# Altium PCB JLINK V8_V1.PcbDoc
Units mm, origin at the board's own origin, x right, y up, seen from the top; angles counter-clockwise.
Board outline 69.48 x 46.62 mm, 2 copper layers (Top Layer, Bottom Layer); 71 components, 76 nets, 356 pads, 84 vias.
Unrouted connection lines stored in the file: 5.
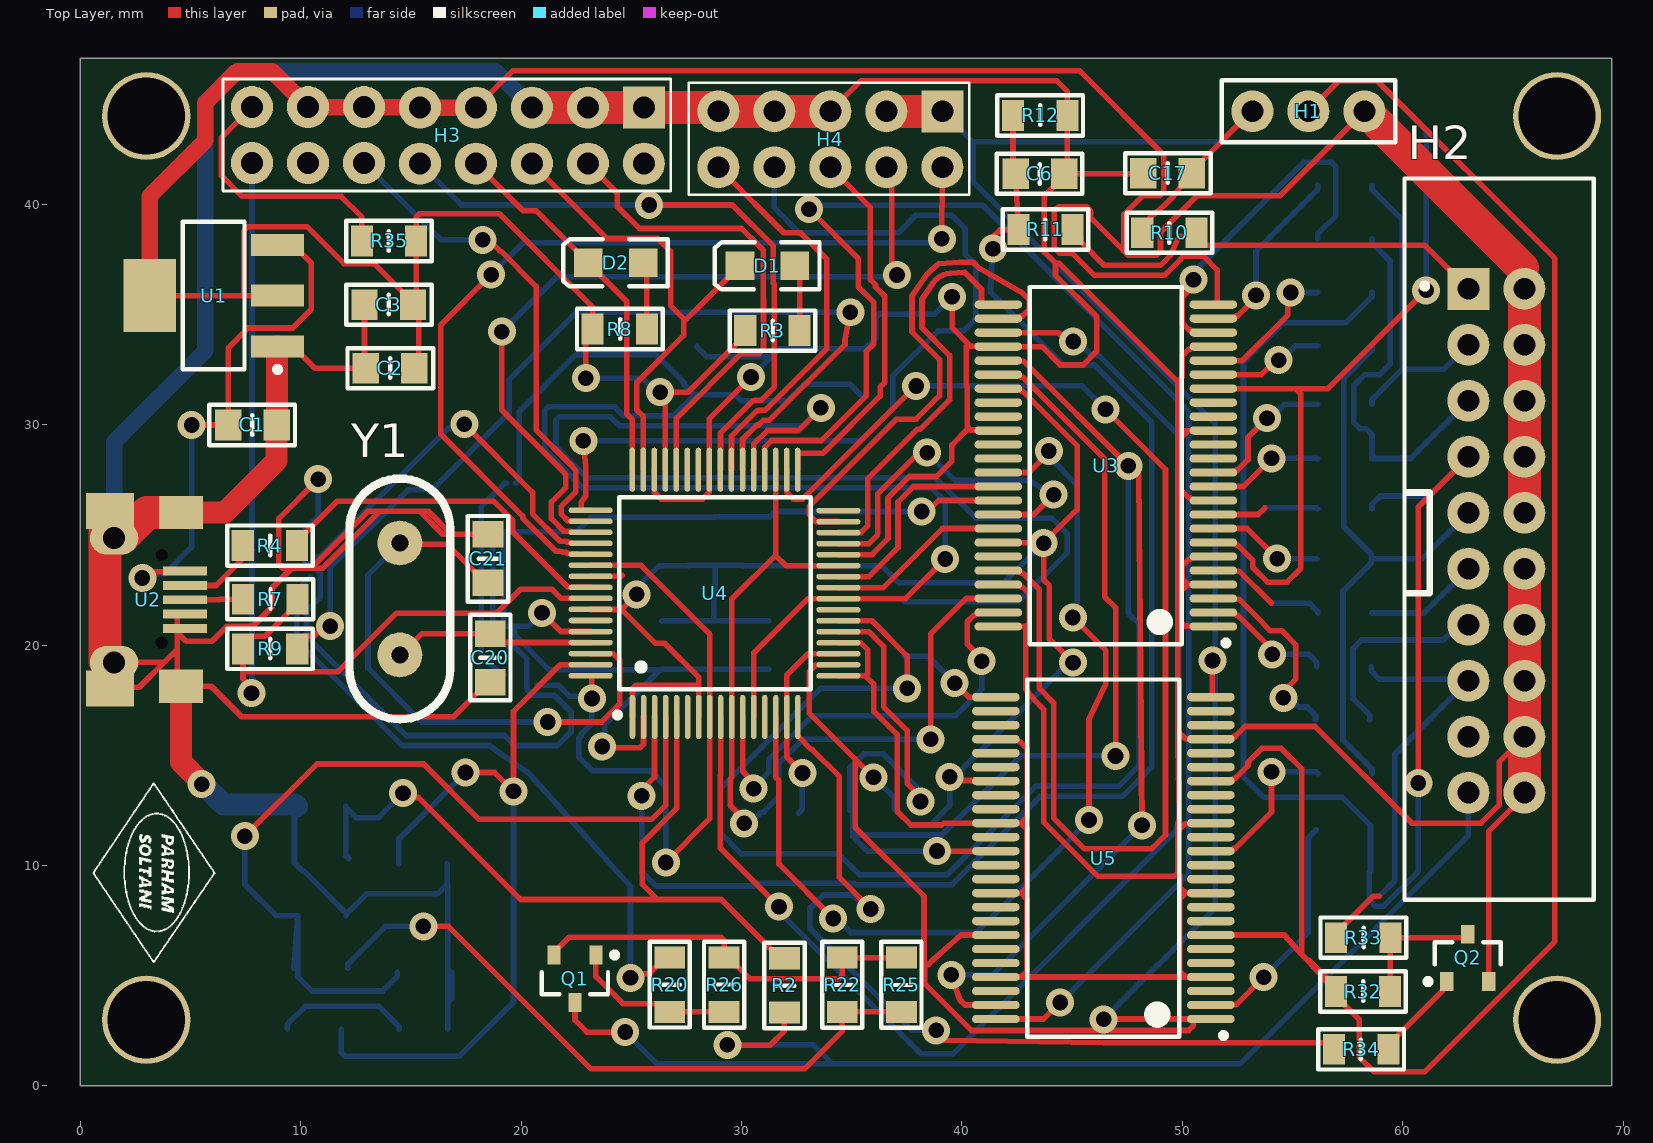
[diagram p0: Top Layer view]
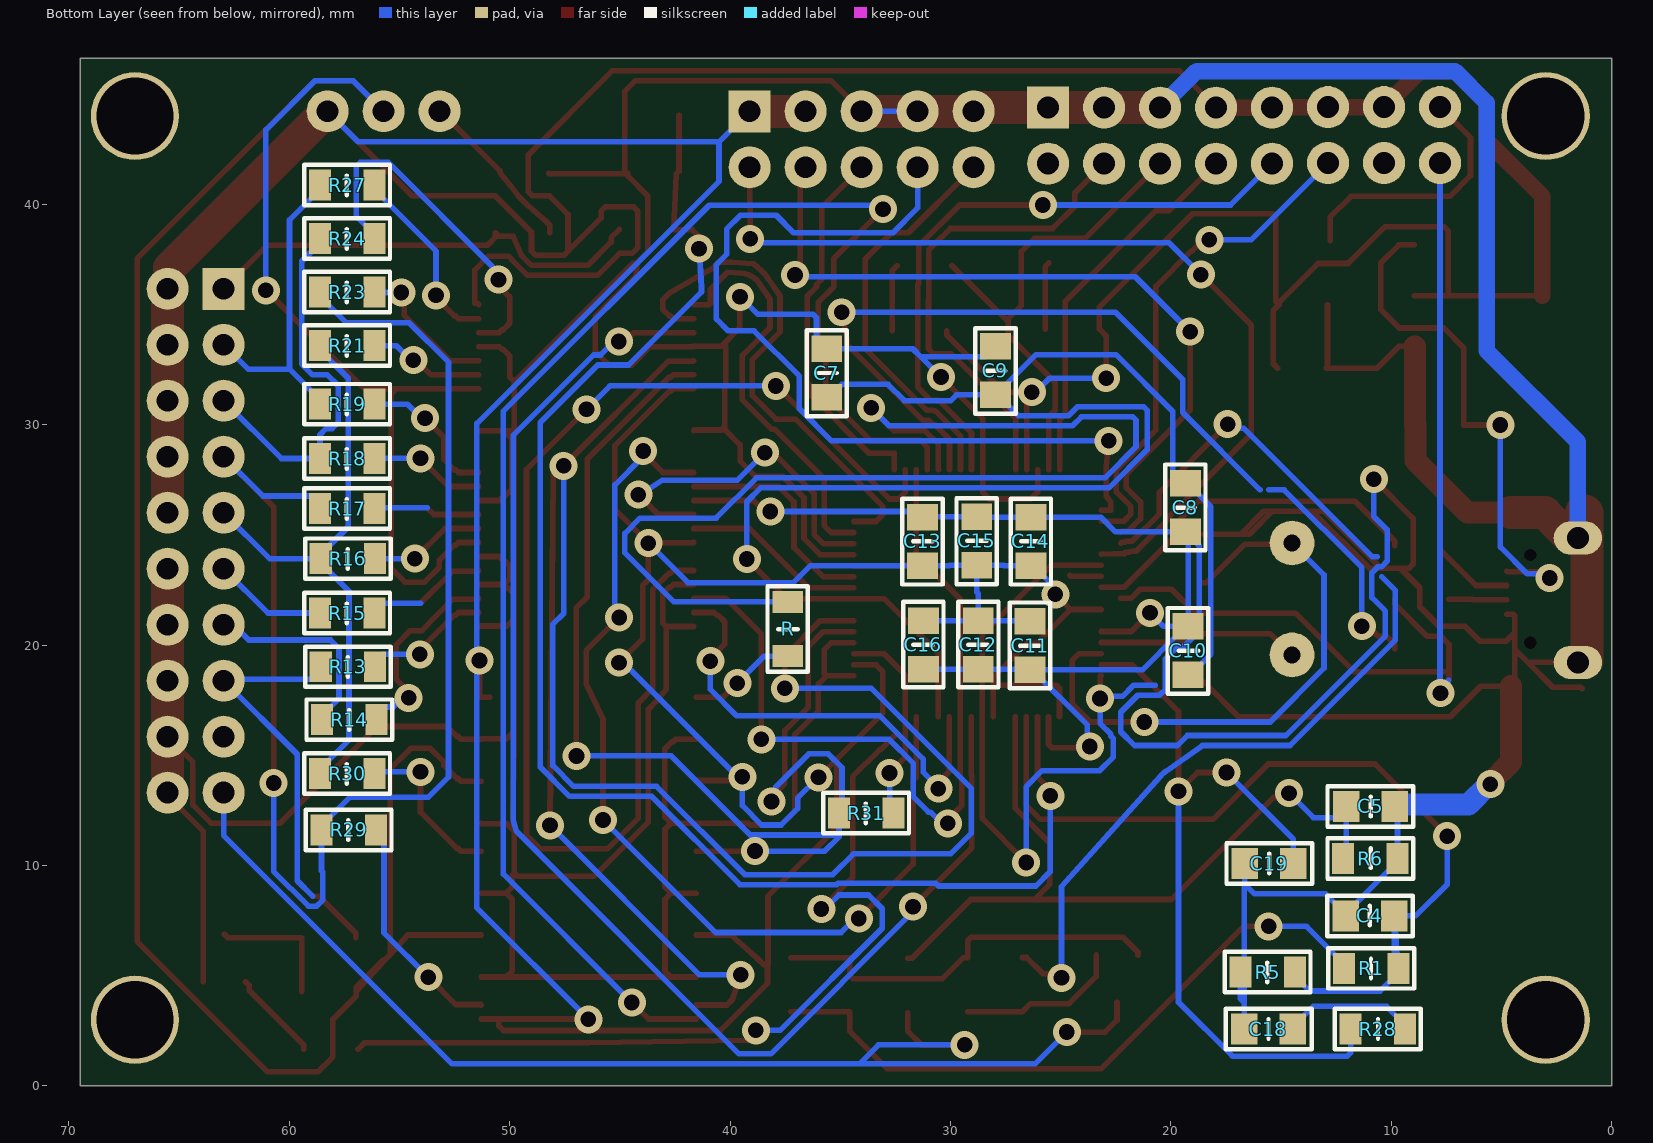
[diagram p1: Bottom Layer view, seen from below]

## Layer stack, top to bottom
Top Solder: solder mask 0.0102, Solder Resist, Dk 3.5
Top Layer: signal copper 0.0356
Dielectric 1: dielectric 0.32, FR-4, Dk 4.8
Bottom Layer: signal copper 0.0356
Bottom Solder: solder mask 0.0102, Solder Resist, Dk 3.5

## Board outline
0,0 69.485,0 69.485,46.624 0,46.624

## Design rules (kind name [scope] priority, off if disabled: settings)
Clearance POLYGON [InPolygon] p1: gap=0.635 ignorepadtopadclearanceinfootprint=FALSE except(0: Arc-Hole Track-Hole SMDPad-Hole THPad-Hole Via-Hole Fill-Hole Poly-Hole Region-Hole Text-Hole)
Clearance [All] p2: gap=0.305 ignorepadtopadclearanceinfootprint=TRUE except(0: Arc-Hole Track-Hole SMDPad-Hole THPad-Hole Via-Hole Fill-Hole Poly-Hole Region-Hole Text-Hole; 0.2: Arc-Arc Arc-Track Arc-SMDPad Track-Track Track-SMDPad SMDPad-SMDPad)
PlaneConnect [All] p1: planeconnectstyle=Direct reliefexpansion=0.508 reliefentries=4 reliefconductorwidth=0.254 reliefairgap=0.254
PolygonConnect [All] p1: connectstyle=Direct reliefconductorwidth=0.254 reliefentries=4 polygonreliefangle="90 Angle" airgapwidth=0.254
RoutingVias [All] p1: holewidth=0.711 width=1.27 viastyle="Through Hole" minholewidth=0.711 minwidth=1.27 maxholewidth=0.711 maxwidth=1.27
SolderMaskExpansion [All] p1: expansion=0.102 istentingtop=FALSE
Width [All] p1: maxlimit=5 minlimit=0.254 preferedwidth=0.254 minimp=50.000000 maximp=50.000000 favimp=50.000000
29 further rules are at their usual default settings.

## Components (designator, comment, footprint, x,y, rotation, side; value= is the part's Value field where it differs from the comment)
C1 "10uf" "CAP-0805 - better" 7.815,29.985 r0 top
C2 "10uf" "CAP-0805 - better" 14.06,32.557 r180 top
C3 "100uf" "CAP-0805 - better" 13.998,35.438 r180 top
C4 "100nf" "CAP-0805 - better" 10.98,7.711 r0 bottom
C5 "100nf" "CAP-0805 - better" 10.942,12.679 r180 bottom
C6 "100nf" "CAP-0805 - better" 43.539,41.38 r0 top
C7 "10uf" "CAP-0805 - better" 35.618,32.341 r90 bottom
C8 "100nf" "CAP-0805 - better" 19.347,26.236 r270 bottom
C9 "100nf" "CAP-0805 - better" 27.965,32.446 r90 bottom
C10 "100nf" "CAP-0805 - better" 19.224,19.75 r90 bottom
C11 "10uf" "CAP-0805 - better" 26.393,19.973 r270 bottom
C12 "100nf" "CAP-0805 - better" 28.74,20.01 r270 bottom
C13 "100nf" "CAP-0805 - better" 31.27,24.704 r90 bottom
C14 "100nf" "CAP-0805 - better" 26.356,24.704 r90 bottom
C15 "100nf" "CAP-0805 - better" 28.813,24.723 r90 bottom
C16 "100nf" "CAP-0805 - better" 31.234,20.01 r270 bottom
C17 "100nf" "CAP-0805 - better" 49.332,41.404 r180 top
C18 "10nf" "CAP-0805 - better" 15.577,2.578 r0 bottom
C19 "1nf" "CAP-0805 - better" 15.548,10.085 r0 bottom
C20 "22pf" "CAP-0805 - better" 18.606,19.418 r270 top
C21 "22pf" "CAP-0805 - better" 18.505,23.922 r90 top
D1 "LED" LED-SMD-0805 32.423,37.207 r180 top
D2 "LED" LED-SMD-0805 25.54,37.341 r180 top
H1 "Header 3" PIN-header3(copy) 58.261,44.216 r180 top
H2 "IDC-box-2*10" ICD-box_10*2 62.976,36.163 r270 top
H3 "IDC-box-2*8" "male-Header 2*8" 25.575,44.407 r180 top
H4 "IDC-box-2*5" "male-Header-2*5 - duplicate" 39.114,44.212 r180 top
Q1 "BC857a" sot23 22.447,4.863 r270 top
Q2 "BC847b" sot23 62.947,5.808 r90 top
R "0R" Res_SMD_0805 37.388,20.717 r270 bottom value=1K
R1 "10k" Res_SMD_0805 10.926,5.332 r0 bottom value=1K
R2 "10k" Res_SMD_0805 31.949,4.546 r270 top value=1K
R3 "330R" Res_SMD_0805 31.417,34.264 r0 top value=1K
R4 "47R" Res_SMD_0805 8.62,24.511 r0 top value=1K
R5 "10K" Res_SMD_0805 15.626,5.165 r0 bottom value=1K
R6 "10K" Res_SMD_0805 10.942,10.315 r180 bottom value=1K
R7 "47R" Res_SMD_0805 8.636,22.077 r0 top value=1K
R8 "330R" Res_SMD_0805 24.493,34.336 r0 top value=1K
R9 "1.5k" Res_SMD_0805 8.629,19.826 r0 top value=1K
R10 "4R7" Res_SMD_0805 49.401,38.703 r180 top value=1K
R11 "10K" Res_SMD_0805 43.779,38.855 r180 top value=1K
R12 "10K" Res_SMD_0805 43.564,44.024 r0 top value=1K
R13 "220R" Res_SMD_0805 57.352,19.016 r0 bottom value=1K
R14 "220R" Res_SMD_0805 57.287,16.614 r0 bottom value=1K
R15 "220R" Res_SMD_0805 57.385,21.452 r0 bottom value=1K
R16 "220R" Res_SMD_0805 57.352,23.92 r0 bottom value=1K
R17 "220R" Res_SMD_0805 57.385,26.19 r0 bottom value=1K
R18 "220R" Res_SMD_0805 57.385,28.461 r0 bottom value=1K
R19 "220R" Res_SMD_0805 57.385,30.929 r0 bottom value=1K
R20 "1K" Res_SMD_0805 26.745,4.58 r270 top
R21 "220R" Res_SMD_0805 57.385,33.587 r0 bottom value=1K
R22 "1R" Res_SMD_0805 34.573,4.576 r270 top value=1K
R23 "220R" Res_SMD_0805 57.385,36.014 r0 bottom value=1K
R24 "220R" Res_SMD_0805 57.385,38.441 r0 bottom value=1K
R25 "1R" Res_SMD_0805 37.253,4.576 r270 top value=1K
R26 "47k" Res_SMD_0805 29.214,4.602 r90 top value=1K
R27 "220R" Res_SMD_0805 57.385,40.868 r0 bottom value=1K
R28 "1k5" Res_SMD_0805 10.607,2.578 r180 bottom value=1K
R29 "220R" Res_SMD_0805 57.319,11.612 r0 bottom value=1K
R30 "220R" Res_SMD_0805 57.385,14.171 r0 bottom value=1K
R31 "1K" Res_SMD_0805 33.841,12.379 r0 bottom
R32 "10k" Res_SMD_0805 58.207,4.282 r0 top value=1K
R33 "220R" Res_SMD_0805 58.225,6.724 r0 top value=1K
R34 "10k" Res_SMD_0805 58.099,1.66 r180 top value=1K
R35 "1k5" Res_SMD_0805 13.998,38.334 r180 top value=1K
U1 "AMS1117-3V3" AMS1117-3V3 6.057,35.854 r90 top
U2 "USB-micro-B" USB-micro-b 3.057,22.054 r180 top
U3 "alvc164245" SSOP48 46.529,28.143 r180 top
U4 "AT91SAM7s64" LQFP-64 28.798,22.353 r90 top
U5 "alvc164245" SSOP48 46.416,10.336 r180 top
Y1 "8MHz" crystall 14.505,24.631 r270 top

## Footprints (in the part's own frame and the unit in brackets; to place one, negate y for a bottom-side part, rotate by r counter-clockwise, add the part's x,y. Pads: shape width x height; smd on the part's side, far side on the other; paste and mask are expansions set on the pad)
AMS1117-3V3 [mm]
  rect 1x2.4 smd: 1(-2.3,-2.9) 2(0,-2.9) 3(2.3,-2.9)
  rect 3.3x2.4 smd: 4(0,2.9)
  silkscreen extent -3.47,-3.03 3.35,1.4, body extent -3.24,-3.49 3.24,3.49, height 1.64
"CAP-0805 - better" [mm]
  rect 1.2x1.4 smd: 1(-1.1,0) 2(1.1,0)
  silkscreen extent -1.96,-0.91 1.93,0.91, body extent -1.04,-0.64 0.99,0.63, height 0.65
crystall [mil]
  round 80 hole 30: 1(0,0) 2(200,0)
  silkscreen extent -115,-90 315,90, body extent -123,-90 324,93, height 138
ICD-box_10*2 [mil]
  rect 75x75 hole 39: 1(0,0)
  round 75 hole 39: 2(0,100) 3(100,0) 4(100,100) 5(200,0) 6(200,100) 7(300,0) 8(300,100) 9(400,0) 10(400,100) 11(500,0) 12(500,100) 13(600,0) 14(600,100) 15(700,0) 16(700,100) 17(800,0) 18(800,100) 19(900,0) 20(900,100)
  silkscreen extent -197,-114 1091,224, body extent -196,-112 1092,223, height 350
LED-SMD-0805 [mm]
  rect 1.3x1.3 smd: 1(0,0) 2(2.489,0)
  silkscreen extent -1.12,-1.07 3.63,1.07, body extent 0.23,-0.63 2.26,0.64, height 1.1
LQFP-64 [mm]
  oval 2x0.25 smd: 1(-5.613,3.741) 2(-5.613,3.241) 3(-5.613,2.741) 4(-5.613,2.241) 5(-5.613,1.741) 6(-5.613,1.241) 7(-5.613,0.741) 8(-5.613,0.241) 9(-5.613,-0.259) 10(-5.613,-0.759) 11(-5.613,-1.259) 12(-5.613,-1.759) 13(-5.613,-2.259) 14(-5.613,-2.759) 15(-5.613,-3.259) 16(-5.613,-3.759) 33(5.601,-3.75) 34(5.601,-3.25) 35(5.601,-2.75) 36(5.601,-2.25) 37(5.601,-1.75) 38(5.601,-1.25) 39(5.601,-0.75) 40(5.601,-0.25) 41(5.601,0.25) 42(5.601,0.75) 43(5.601,1.25) 44(5.601,1.75) 45(5.601,2.25) 46(5.601,2.75) 47(5.601,3.25) 48(5.601,3.75)
  oval 0.25x2 smd: 17(-3.75,-5.601) 18(-3.25,-5.601) 19(-2.75,-5.601) 20(-2.25,-5.601) 21(-1.75,-5.601) 22(-1.25,-5.601) 23(-0.75,-5.601) 24(-0.25,-5.601) 25(0.25,-5.601) 26(0.75,-5.601) 27(1.25,-5.601) 28(1.75,-5.601) 29(2.25,-5.601) 30(2.75,-5.601) 31(3.25,-5.601) 32(3.75,-5.601) 49(3.761,5.639) 50(3.261,5.639) 51(2.761,5.639) 52(2.261,5.639) 53(1.761,5.639) 54(1.261,5.639) 55(0.761,5.639) 56(0.261,5.639) 57(-0.239,5.639) 58(-0.739,5.639) 59(-1.239,5.639) 60(-1.739,5.639) 61(-2.239,5.639) 62(-2.739,5.639) 63(-3.239,5.639) 64(-3.739,5.639)
  silkscreen extent -5.65,-4.35 4.35,4.55, body extent -6,-6 6,6, height 1.7
"male-Header 2*8" [mil]
  rect 75x75 hole 39: 1(0,1)
  round 75 hole 39: 2(0,101) 3(100,1) 4(100,101) 5(200,1) 6(200,101) 7(300,1) 8(300,101) 9(400,1) 10(400,101) 11(500,0) 12(500,100) 13(600,0) 14(600,100) 15(700,0) 16(700,100)
  silkscreen extent -48,-50 752,150, body extent -48,-51 752,149, height 336
"male-Header-2*5 - duplicate" [mil]
  rect 75x75 hole 39: 1(0,0)
  round 75 hole 39: 2(0,100) 3(100,0) 4(100,100) 5(200,0) 6(200,100) 7(300,0) 8(300,100) 9(400,0) 10(400,100)
  silkscreen extent -48,-51 453,149, body extent -48,-52 452,148, height 336
PIN-header3(copy) [mil]
  round 75 hole 39: 1(0,0) 2(100,0) 3(200,0)
  silkscreen extent -55,-55 255,55, body extent -49,-49 251,51, height 330
Res_SMD_0805 [mm]
  rect 1x1.4 smd: 1(-1.245,0) 2(1.219,0)
  silkscreen extent -1.96,-0.91 1.93,0.91, body extent -1,-0.63 1.03,0.64, height 0.6
sot23 [mm]
  rect 0.85x0.6 smd: 1(-1.075,0.95) 2(-1.075,-0.95) 3(1.075,0)
  silkscreen extent -1.2,-1.5 0.7,1.93, body extent -1.28,-1.5 1.22,1.5, height 1.05
SSOP48 [mil]
  oval 85x15 smd: 1(-192,287.5) 2(-192,262.5) 3(-192,237.5) 4(-192,212.5) 5(-192,187.5) 6(-192,162.5) 7(-192,137.5) 8(-192,112.5) 9(-192,87.5) 10(-192,62.5) 11(-192,37.5) 12(-192,12.5) 13(-192,-12.5) 14(-192,-37.5) 15(-192,-62.5) 16(-192,-87.5) 17(-192,-112.5) 18(-192,-137.5) 19(-192,-162.5) 20(-192,-187.5) 21(-192,-212.5) 22(-192,-237.5) 23(-192,-262.5) 24(-192,-287.5) 25(192,-287.5) 26(192,-262.5) 27(192,-237.5) 28(192,-212.5) 29(192,-187.5) 30(192,-162.5) 31(192,-137.5) 32(192,-112.5) 33(192,-87.5) 34(192,-62.5) 35(192,-37.5) 36(192,-12.5) 37(192,12.5) 38(192,37.5) 39(192,62.5) 40(192,87.5) 41(192,112.5) 42(192,137.5) 43(192,162.5) 44(192,187.5) 45(192,212.5) 46(192,237.5) 47(192,262.5) 48(192,287.5)
  silkscreen extent -219,-319 136,322, body extent -205,-315 205,315, height 104
USB-micro-b [mm]
  round 0 hole 0.55: 0(-0.643,1.952) 0(-0.643,-2.039)
  rect 2x0.4 smd paste-25.4 mask-25.4: 1(-1.705,-1.298) 2(-1.705,-0.648) 3(-1.705,0.002) 4(-1.705,0.652) 5(-1.705,1.302)
  rect 2x1.5 smd: 6(-1.521,3.924) 8(-1.521,-3.95)
  rect 2.159x1.651 smd: 7(1.705,4.026) 9(1.705,-4.026)
  oval 2.2x1.5 hole 1: 10(1.516,2.84) 11(1.516,-2.801)
  body extent -2,-5.89 28.93,6.11, height 5.5

## Part data
C1 C2 C3 C4 C5 C6 C7 C8 C9 C10 C11 C12 C13 C14 C15 C16 C17 C18 C19 C20 C21: library part CAP-0805
D1 D2: library part LED-SMD-RED
H1: library part "Header 1*3", "Header, 3-Pin", LatestRevisionDate=17-Jul-2002, LatestRevisionNote="Re-released for DXP Platform.", Publisher="Altium Limited"
H2: library part "Header 2*10"
H3: library part "Header 2*8"
H4: library part "Header 2*5", "Header, 5-Pin, Dual row", LatestRevisionDate=17-Jul-2002, LatestRevisionNote="Re-released for DXP Platform.", Publisher="Altium Limited"
Q1: library part PNP, "PNP Bipolar Transistor", LatestRevisionDate=29-May-2009, LatestRevisionNote="IPC-7351 Footprint Added.", PackageDescription="3-Pin SOT-23 Package 0.95 mm Pitch, 2.4 mm Lead Span", PackageReference=SOT-23B, PackageVersion=Aug-1999, Published=8-Jun-2000, Publisher="Altium Limited"
Q2: library part NPN, "NPN Bipolar Transistor", LatestRevisionDate=29-May-2009, LatestRevisionNote="IPC-7351 Footprint Added.", PackageDescription="3-Pin SOT-23 Package 0.95 mm Pitch, 2.4 mm Lead Span", PackageReference=SOT-23B, PackageVersion=Aug-1999, Published=8-Jun-2000, Publisher="Altium Limited"
R R1 R2 R3 R4 R5 R6 R7 R8 R9 R10 R11 R12 R13 R14 R15 R16 R17 R18 R19 R20 R21 R22 R23 R24 R25 R26 R27 R28 R29 R30 R31 R32 R33 R34 R35: library part Res, "Resistor", LatestRevisionDate=17-Jul-2002, LatestRevisionNote="Re-released for DXP Platform.", PackageDescription="Axial Device, Thru-Hole; 2 Leads; 0.3 in Pin Spacing", PackageReference=AXIAL-0.3, Published=8-Jun-2000, Publisher="Altium Limited"
U1: library part AMS1117IMP-(SOT-223), "x.x Volt, 800mA Low-Dropout Linear Regulator, 4-pin SOT-223", Manufacturer="National Semiconductor", PackageTopMarking=XYTT*N05B, PartNumber=LM1117IMP-3.3, PowerWise=N, Supplier Part Number 1=7614123, Code_IPC=SOT223-4, Code_JEDEC=TO-261-AA, ComponentLink1Description="LM1117 Datasheet", ComponentLink1URL=http://www.national.com/ds/LM/LM1117.pdf, ComponentLink2Description="LM1117 Web Page", ComponentLink2URL=http://www.national.com/pf/LM/LM1117.html, ComponentLink3Description="MP04A Package Page", ComponentLink3URL=http://www.national.com/packaging/folders/mp04a.html, CompType="LDO IC", DatasheetVersion=Apr-2006, PackageDescription="Molded SOT-223, 6.50 x 3.56 x 1.6mm Body, 4 Lead, 2.3mm Pitch", PackageReference=MP04A, PackageVersion="revB, Apr-2003", PinCount=4, Published=4-Dec-2008, Publisher="Altium Limited", RoHS=N, Supplier 1=Farnell
U3 U5: library part alvc164245(NXP)
U4: library part AT91SAM7S64(LQFP)
Y1: library part crystall, "XTAL Crystal", Company=E.P.I.L, Design Date=11/04/2011

## Free pads (board coordinates)
  round 4 hole 3.5: 1(3,3) 1(3,44) 1(67,3) 1(67,44)

## Via types
v1: diameter 1.27, hole 0.711, Top Layer to Bottom Layer, 84 vias

## Nets (pads, with @x,y where several pads share a name; then routed paths per layer and width w, separated by ;. In a path a pad name is that pad's centre, name@x,y a point inside that pad or via, vN(x,y) a via of type N, cw(c..) or ccw(c..) an arc to the next point about the centre after c; other vN are vias at no path point)
+3V3: C2.1 C3.1 C11.1 C12.1 C13.1 C14.1 C15.1 C16.1 H1.1 H2.2 H2.4 H2.6 H2.8 H2.10 H3.7 H3.9 H3.11 H3.13 H4.1 H4.3 R3.1 R8.1 R35.1 U1.2 U1.4 U3.24 U3.31 U3.42 U4.1 U4.7 U4.18 U4.45 U4.58 U4.59 U5.1 U5.24 U5.31 U5.42 | length 350.5
  Top Layer w0.254: U1.4 7.417,35.854 ; U1.2 7.417,35.854 ; C2.1 15.362,32.759 15.362,35.175 C3.1 ; H3.7 19.631,46.057 45.341,46.057 49.159,42.239 49.159,40.568 48.968,40.377 48.193,40.377 47.355,39.539 47.355,37.868 ; v1(22.936,32.106) 22.936,34.023 R8.1 23.248,35.332 19.017,39.564 15.392,39.564 15.243,39.415 15.243,35.583 C3.1 ; U4.58 24.56,21.614 ; U4.1 25.057,18.034 25.206,18.183 27.908,18.183 28.057,18.034 ; v1(25.248,22.301) 24.56,21.614 ; U4.45 v1@26.548,30.962 ; v1@26.548,31.471 27.579,31.471 30.172,34.064 R3.1 ; U4.7 28.057,18.034 ; U4.18 34.397,19.101 33.383,19.101 33.072,18.79 33.072,16.915 35.154,14.834 ; v1(35.992,13.995) 35.154,14.834 ; 38.303,5.51 38.303,4.65 40.438,2.515 50.286,2.515 50.488,2.716 50.488,2.975 U5.1@50.546,3.034 ; v1(39.446,14.021) 39.614,13.853 41.515,13.853 U5.31 ; U5.42 39.965,6.844 38.822,5.841 ccw(c39.525,5.038) 38.77,5.792 38.487,5.51 38.28,5.51 38.28,8.608 35.154,11.735 35.154,14.834 ; U3.42 41.665,24.638 43.799,24.638 43.707,24.545 43.707,22.961 43.966,22.701 43.966,20.269 v1(45.038,19.197) ; U3.31 42.575,31.636 42.693,31.518 42.755,31.518 45.228,29.046 45.228,26.146 v1(43.707,24.625) ; v1(46.431,3.023) 46.442,3.034 U5.1 ; U5.24@50.91,17.639 51.307,17.639 51.366,17.697 v1(51.366,19.298) ; U3.24 51.464,35.504 51.577,35.504 51.577,37.018 50.952,37.643 50.066,37.643 49.999,37.593 ccw(c50.149,37.389) 49.928,37.513 49.917,37.494 49.917,37.492 49.194,36.768 46.016,36.768 45.003,37.781 44.435,37.781 44.196,38.02 44.196,39.691 44.388,39.882 45.659,39.882 45.85,39.691 45.85,39.373 47.355,37.868 ; H1.1 54.421,40.377 50.657,40.377 49.009,38.729 49.009,37.868 48.817,37.676 47.547,37.676 47.355,37.868 ; 7.417,35.854 7.417,38.777 7.621,38.981 10.292,38.981 11.966,37.307 13.33,37.307 15.098,35.538 C3.1 ; 24.56,21.614 26.096,20.078 26.521,20.078 28.057,18.542 28.057,18.034
  Top Layer w0.75: U1.4 3.157,40.367 5.68,42.89 5.68,44.6 7.119,46.039 8.703,46.039 H3.13 H3.11 12.888,44.394 15.402,44.394 H3.9 H3.7
  Top Layer w1.5: H4.3 H4.1 ; H1.1 58.32,44.216 H2.2@65.439,37.097 ; H2.10 H2.8 H2.6 H2.4 H2.2
  Bottom Layer w0.254: v1(22.936,32.106) 25.513,32.106 26.148,31.471 v1(26.314,31.471) ; v1(25.248,22.301) 25.442,22.496 25.442,22.79 26.256,23.604 27.576,23.604 27.594,23.623 C15.1 ; C11.1 26.429,21.11 C12.1 ; C16.1 C12.1 ; v1(35.992,13.995) 36.935,13.052 36.935,12.585 37.684,11.836 38.567,11.836 39.446,12.715 39.446,13.829 v1@39.35,13.925 ; H4.1 40.503,42.824 ; v1(39.446,14.021) 39.654,14.021 44.831,19.197 v1(45.038,19.197) ; v1(43.707,24.625) 41.916,22.835 37.127,22.835 36.357,23.604 30.051,23.604 30.033,23.623 C15.1 ; v1(46.431,3.023) 51.486,8.077 51.486,19.178 v1(51.366,19.298) 51.486,19.419 51.486,30.055 40.503,41.038 40.503,42.824 ; H1.1 56.869,42.824 40.503,42.824 ; C12.1 28.74,22.33 28.813,22.403 C15.1
+5V: C1.1 R1.2 R22.2 R25.2 U1.3 U2.1 | length 54.3
  Top Layer w0.254: v1(2.819,23.038) 3.094,23.038 3.381,23.325 4.735,23.325 U2.1 ; v1(5.055,29.985) C1.1 6.715,33.475 7.621,34.381 9.646,34.381 10.484,35.219 10.484,37.327 9.657,38.154 U1.3 ; v1(15.57,7.239) 16.704,7.239 23.16,0.783 32.876,0.783 34.569,2.476 34.569,3.353 R22.2 R25.2
  Bottom Layer w0.254: v1(2.819,23.038) 3.011,23.229 3.835,23.229 5.055,24.448 v1(5.055,29.985) ; R1.2 12.146,5.532 13.853,7.239 v1(15.57,7.239)
+18V: C7.1 C8.1 C9.1 C10.1 U4.8 U4.12 U4.24 U4.54 U4.64 | length 108.1
  Top Layer w0.254: U4.64 23.214,18.614 23.216,18.612 v1(23.216,17.577) ; U4.54 25.444,23.614 28.557,20.5 28.557,12.123 v1(26.568,10.135) ; U4.12 30.557,19.642 33.018,22.103 37.445,22.103 v1(39.243,23.901)
  Bottom Layer w0.254: C10.1 19.124,18.65 18.197,19.577 18.197,26.285 19.247,27.336 C8.1 ; C8.1@19.743,27.336 19.92,27.513 19.92,30.598 22.494,33.172 26.121,33.172 27.392,31.902 27.392,31.819 C9.1@27.865,31.346 ; 20.705,18.177 21.693,18.177 22.2,17.67 23.122,17.67 v1(23.216,17.577) 23.216,16.442 22.73,15.956 22.73,15.88 22.616,15.766 22.616,14.915 23.231,14.3 25.842,14.3 26.568,13.574 v1(26.568,10.135) ; C7.1 35.518,31.241 34.933,31.826 32.829,31.826 32.092,31.09 29.987,31.09 29.731,31.346 C9.1@27.865,31.346 ; v1(39.243,23.901) 39.243,26.502 38.618,27.127 22.811,27.127 21.08,28.858 21.08,30.658 21.229,30.807 24.254,30.807 24.657,30.404 26.922,30.404 C9.1@27.865,31.346
AD4: C6.1 R11.2 R12.1 U4.3 | length 67.4
  Top Layer w0.254: v1(25.476,13.157) 25.476,13.432 26.057,14.013 U4.3 ; v1(41.408,37.982) 41.411,38.522 41.725,38.837 42.541,38.837 R11.2 C6.1 42.319,41.499 R12.1
  Bottom Layer w0.254: v1(25.476,13.157) 25.476,9.718 26.127,9.068 30.547,9.068 30.674,9.195 35.095,9.195 35.157,9.133 39.554,9.133 43.554,13.132 47.284,13.132 48.615,14.463 48.615,30.096 46.006,32.706 44.61,32.706 41.299,36.017 41.299,36.227 v1(41.408,37.982)
AD5: C4.1 R1.1 R5.1 U4.4 | length 41.4
  Top Layer w0.254: v1(7.468,11.328) 10.744,14.605 15.586,14.605 18.101,12.09 25.918,12.09 26.557,12.729 U4.4
  Bottom Layer w0.254: v1(7.468,11.328) 7.468,9.144 8.901,7.711 C4.1 ; R1.1 C4.1 ; R5.1 14.381,4.965 13.722,4.305 10.509,4.305 9.88,4.934 C4.1
AD6: C5.1 R2.1 R6.1 U4.5 | length 35.3
  Top Layer w0.254: v1(14.645,13.28) 14.839,13.085 15.352,13.085 19.979,8.458 26.187,8.458 ; U4.5 27.057,12.587 25.502,11.032 25.502,9.144 26.187,8.458 ; R2.1 31.749,5.791 29.082,8.458 26.187,8.458
  Bottom Layer w0.254: R6.1 12.042,10.46 C5.1 12.042,12.646 12.515,12.173 13.538,12.173 v1(14.645,13.28)
ERS: H3.14 U4.55 | length 1.4
  Top Layer w0.254: U4.55 24.541,23.114 24.587,23.16
GND: C1.2 C2.2 C3.2 C4.2 C5.2 C6.2 C7.2 C8.2 C9.2 C10.2 C11.2 C12.2 C13.2 C14.2 C15.2 C16.2 C17.2 C18.2 C19.2 C20.2 C21.2 H2.12 H2.14 H2.16 H2.18 H2.20 H3.1 H3.3 H3.5 H4.5 H4.7 H4.9 Q2.2 R5.2 R6.2 R12.2 U1.1 U2.4 U2.5 U2.6 U2.7 U2.8 U2.9 U2.10 U2.11 U3.1 U3.4 U3.6 U3.10 U3.15 U3.21 U3.28 U3.34 U3.39 U3.45 U3.48 U4.2 U4.17 U4.20 U4.28 U4.41 U4.46 U4.60 U5.4 U5.10 U5.15 U5.21 U5.28 U5.34 U5.39 U5.45 | length 490.7
  Top Layer w0.254: U2.7 1.406,18.083 2.681,18.083 3.812,19.214 ; U2.11 U2.10 3.812,19.214 ; 4.578,16.002 4.407,16.173 4.407,19.809 ; U2.6 5.945,18.13 7.328,16.747 16.934,16.747 18.506,18.318 C20.2 ; U2.4 4.48,21.402 4.407,21.329 U2.5@4.407,20.569 ; U1.1 9.657,33.554 10.654,32.557 C2.2 12.898,32.619 C3.2 ; v1(10.799,27.525) 9.013,25.739 9.013,23.675 9.204,23.484 9.6,23.484 ; C21.2 16.847,25.022 ; v1(20.955,21.465) 21.804,20.616 23.157,20.616 U4.60 ; v1(23.683,15.4) 23.737,15.345 25.408,15.345 25.557,15.494 U4.2 ; U4.46 26.05,27.952 26.05,26.938 26.361,26.627 28.235,26.627 28.546,26.938 28.546,27.952 U4.41 28.548,30.275 v1(30.429,32.156) ; H4.5 35.425,45.603 44.284,45.603 44.783,45.105 R12.2 44.783,41.524 C6.2 ; U4.17 35.624,18.603 ; U4.20 34.401,20.101 35.415,20.101 35.726,19.79 35.726,18.705 35.624,18.603 ; U4.28 35.922,24.103 36.646,24.827 36.646,26.681 37.61,27.645 38.851,27.645 39.548,28.342 39.548,29.074 40.245,29.772 ; v1(38.176,26.06) 38.451,26.06 38.947,26.556 U3.39 ; v1(39.555,35.799) 39.555,34.397 40.403,33.549 ; 40.245,29.898 40.245,31.697 40.191,31.751 40.191,33.549 40.403,33.549 ; 40.263,29.88 40.389,29.755 41.628,29.755 U3.34 ; U5.45 42.674,4.939 ; U5.39 42.674,8.749 ; U5.28 42.463,15.734 42.58,15.616 42.643,15.616 42.961,15.298 42.961,12.199 42.68,11.917 ; U3.48 42.904,20.841 ; U3.45 42.575,22.746 42.693,22.628 42.755,22.628 43.058,22.325 43.058,20.995 42.904,20.841 ; C17.2 48.208,41.38 C6.2 ; U5.4 50.159,4.939 ; U5.10 50.159,8.749 ; U5.15 51.269,11.899 50.135,11.899 49.784,11.549 ; U3.1 51.381,20.865 50.128,20.865 49.784,21.209 ; U3.4 50.259,22.746 ; U3.6 50.482,24.016 50.365,23.898 50.302,23.898 49.983,23.58 49.983,23.021 50.259,22.746 ; U3.10 50.482,26.556 50.365,26.673 50.302,26.673 49.894,27.081 49.894,29.353 50.271,29.731 ; U3.15 50.271,29.731 ; U3.21 50.482,33.541 50.365,33.423 50.302,33.423 49.999,33.12 49.999,32.168 49.784,31.953 ; Q2.2 63.897,11.547 65.516,13.167 H2.20 ; H2.18 64.375,14.702 64.375,12.744 63.55,11.919 60.409,11.919 56.022,16.306 52.851,16.306 52.396,15.851 52.334,15.851 52.216,15.734 U5.21 51.269,15.758 50.135,15.758 49.784,16.109 ; 3.812,19.214 4.407,19.809 ; 4.407,19.809 U2.5@4.407,20.569 ; U2.5@4.407,20.569 4.805,20.171 5.976,20.171 6.658,20.853 7.83,20.853 8.715,21.738 8.715,22.599 9.6,23.484 ; 9.6,23.484 10.475,23.484 ; 10.475,23.484 11,23.484 13.594,26.078 ; 10.475,23.484 13.07,26.078 13.594,26.078 ; 13.594,26.078 15.39,26.078 ; 15.39,26.078 15.79,26.078 16.847,25.022 ; 15.39,26.078 16.446,25.022 16.847,25.022 ; 35.624,18.603 35.995,18.232 35.995,17.004 37.059,15.941 37.059,12.461 37.684,11.836 39.094,11.836 39.181,11.924 U5.34 41.546,11.917 42.68,11.917 ; 40.403,33.549 41.643,33.549 U3.28 43.629,33.541 44.464,32.706 45.494,32.706 46.118,33.331 46.118,34.9 44.247,36.772 44.247,37.327 ; 42.674,4.939 50.159,4.939 ; 42.674,4.939 42.955,5.22 42.955,8.467 42.674,8.749 ; 42.674,8.749 42.955,9.03 42.955,11.642 42.68,11.917 ; 42.904,20.841 42.904,18 43.3,17.499 43.71,17.089 43.71,11.97 46.176,9.504 49.635,9.504 49.784,9.653 ; 44.247,37.327 43.742,37.832 43.742,40.383 44.639,41.28 C6.2 ; 44.247,37.327 44.41,37.327 49.784,31.953 ; 49.784,9.653 49.784,11.549 ; 49.784,9.653 49.877,9.559 49.877,9.03 50.159,8.749 ; 49.784,11.549 49.784,11.892 ccw(c48.799,12.301) 49.865,12.329 49.784,15.39 49.784,16.109 ; 49.784,16.109 49.784,21.209 ; 49.784,21.209 49.784,22.3 ; 49.784,22.3 49.784,29.731 ; 49.784,22.3 50.259,22.746 ; 49.784,29.731 50.271,29.731 ; 49.784,29.731 49.784,31.953 ; 50.159,4.939 49.877,5.22 49.877,8.467 50.159,8.749
  Top Layer w1: U2.6 4.578,16.002 4.578,14.691 5.51,13.758 v1(5.51,13.685) ; U2.8 6.552,26.004 8.916,28.368 C1.2 8.936,30.005 8.936,33.554 U1.1
  Top Layer w1.5: U2.9 1.205,26.08 1.13,26.004 1.13,19.275 1.191,19.214 U2.10 ; U2.11 1.891,24.855 3.04,26.004 U2.8 ; H3.5 H3.3 H3.1 28.676,44.381 28.845,44.212 H4.9 H4.7 H4.5 ; H2.20 H2.18 H2.16 H2.14 H2.12
  Bottom Layer w0.254: C5.2 9.722,12.56 9.722,10.115 10.095,9.742 10.148,9.742 12.08,7.811 C4.2 ; v1(10.799,27.525) 10.799,25.837 10.187,25.225 10.187,23.812 10.453,23.546 10.619,23.546 10.885,23.28 10.885,22.152 10.272,21.539 10.272,20.411 14.787,15.897 19.256,15.897 19.71,15.443 21.651,15.443 22.276,16.068 22.276,16.952 21.505,17.723 20.517,17.723 20.251,17.989 20.251,19.385 19.69,19.946 19.409,19.946 18.716,20.639 18.716,24.504 18.774,24.563 18.774,24.663 19.247,25.136 C8.2 ; C4.2@12.08,7.811 12.982,8.714 16.218,8.714 16.648,9.144 ; C19.2 16.648,9.144 ; R5.2@16.677,5.165 16.677,9.116 16.648,9.144 ; C18.2 16.677,3.785 ; R5.2@16.677,5.165 16.677,3.785 ; R5.2 16.845,3.952 16.677,3.785 ; C10.2@19.719,20.85 19.719,20.454 21.3,18.873 C11.2@26.293,18.873 ; v1(20.955,21.465) 20.34,20.85 C10.2 19.224,25.012 C8.2 ; v1(23.683,15.4) 23.791,15.508 23.791,16.372 C11.2@26.293,18.873 ; C9.2 28.438,33.073 31.346,33.073 ; v1(30.429,32.156) 31.346,33.073 ; C16.2 C12.2 26.43,18.91 C11.2 C11.2@26.293,18.873 ; H4.7 H4.5 ; v1(38.176,26.06) 31.526,26.06 C13.2 31.252,25.823 C15.2 28.795,25.804 C14.2 23.186,25.804 22.517,25.136 19.743,25.136 C8.2 ; v1(39.555,35.799) 38.74,34.999 36.228,34.999 36.079,34.85 36.079,33.914 C7.2 31.714,33.441 31.346,33.073
  Bottom Layer w0.75: U2.11 1.541,29.215 5.68,33.354 5.68,44.6 7.119,46.039 18.837,46.039 H3.5
  Bottom Layer w1: v1(5.51,13.685) 5.583,13.685 6.501,12.768 9.753,12.768 C5.2
J_RST: H2.15 R13.2 R33.1 | length 19.1
  Top Layer w0.254: R33.1 56.98,6.924 58.664,8.607 58.94,8.607
  Bottom Layer w0.254: R13.2 58.571,18.816 58.944,18.443 62.916,18.443 H2.15 59.639,15.046 59.639,9.306 58.94,8.607
J_RTCK: H2.11 R15.2 | length 5.2
  Bottom Layer w0.254: R15.2 60.965,21.452 H2.11
J_TCK: H2.9 R16.2 R21.2 R30.2 | length 26.8
  Bottom Layer w0.254: R30.2 58.604,14.371 57.29,15.685 57.29,22.439 58.572,23.72 R16.2 ; R21.2 58.604,33.387 57.323,32.106 57.323,25.368 58.572,24.12 R16.2 ; H2.9 60.893,23.92 R16.2
J_TDI: H2.5 R18.2 R24.2 | length 17.4
  Bottom Layer w0.254: R24.2 58.604,38.241 59.431,37.414 59.431,32.751 58.938,32.258 58.271,32.258 57.777,31.764 57.777,30.093 58.053,29.817 58.328,29.817 58.604,29.542 R18.2 60.354,28.461 H2.5
J_TDO: H2.13 R14.2 | length 9.2
  Bottom Layer w0.254: R14.2 58.506,16.814 57.744,17.576 57.744,19.852 58.122,20.229 61.836,20.229 62.529,20.923 H2.13
J_TMS: H2.7 R17.2 R23.2 R29.2 | length 64.4
  Top Layer w0.254: v1(60.706,13.741) 60.706,26.273 H2.7
  Bottom Layer w0.254: R17.2 58.604,26.39 58.977,26.763 61.196,26.763 H2.7 ; R23.2 58.604,35.814 57.404,34.614 54.555,34.614 52.777,32.835 52.777,14.011 53.69,13.098 57.253,13.098 58.538,11.812 58.538,9.755 58.486,9.703 58.486,8.419 58.752,8.153 59.128,8.153 60.706,9.731 v1(60.706,13.741)
J_TRST: H2.3 R19.2 R27.2 | length 14.5
  Bottom Layer w0.254: R19.2 58.604,31.129 59.99,32.514 ; R27.2 58.604,40.668 59.99,39.282 59.99,32.514 ; H2.3 61.868,32.514 59.99,32.514
JSEL: H3.12 U4.50 | length 22.9
  Top Layer w0.254: v1(18.263,38.379) 18.538,38.379 19.046,37.871 19.086,37.871 20.682,36.275 20.682,29.752 22.279,28.155 22.475,27.906 22.475,26.944 21.832,26.301 21.832,25.926 22.143,25.616 23.157,25.616 U4.50
  Bottom Layer w0.254: H3.12 16.363,38.379 v1(18.263,38.379)
NetC17_1: C17.1 H1.3 R10.2 | length 7.6
  Top Layer w0.254: R10.2 48.182,39.048 48.331,39.197 49.156,39.923 49.613,40.38 49.959,40.831 C17.1 50.432,41.504 53.145,44.216 H1.3
NetC18_1: C18.1 R28.2 | length 6.1
  Bottom Layer w0.254: R28.2 9.388,2.778 10.215,3.605 13.55,3.605 14.477,2.678 C18.1
NetD1_1: D1.1 R3.2 | length 3
  Top Layer w0.254: D1.1 32.636,36.993 R3.2
NetD2_1: D2.1 R8.2 | length 3.1
  Top Layer w0.254: D2.1 25.712,37.168 R8.2
NetH2_1: H2.1 R10.1 R11.1 | length 20.7
  Top Layer w0.254: R11.1 45.396,38.482 45.396,38.282 46.456,37.222 49.006,37.222 49.463,37.68 49.844,38.554 50.497,38.554 R10.1 50.646,38.503 51.019,38.13 61.009,38.13 H2.1
NetH3_15: H3.15 R35.2 | length 11.9
  Top Layer w0.254: H3.15 6.411,43.023 6.411,41.293 7.35,40.354 11.84,40.354 12.779,39.415 R35.2
NetQ1_1: Q1.1 R20.2 R26.1 | length 7.5
  Top Layer w0.254: Q1.1 23.397,4.965 24.628,3.734 26.372,3.734 R20.2 29.21,3.361 R26.1
NetQ1_2: Q1.2 R22.1 R25.1 R26.2 | length 18.3
  Top Layer w0.254: Q1.2 21.497,6.063 22.187,6.753 29.065,6.753 29.214,6.604 R26.2 29.414,5.821 30.367,4.868 34.425,4.868 34.573,5.016 R22.1 R25.1
NetQ2_1: Q2.1 R34.1 | length 4.2
  Top Layer w0.254: R34.1 59.344,1.86 61.824,4.34 61.824,4.56 Q2.1
NetQ2_3: Q2.3 R32.2 R33.2 | length 6
  Top Layer w0.254: R32.2 59.426,6.705 R33.2 62.787,6.724 Q2.3
NetR4_1: R4.1 U2.2 | length 3.7
  Top Layer w0.254: U2.2 6.163,22.702 R4.1@7.771,24.311
NetR7_1: R7.1 U2.3 | length 2.6
  Top Layer w0.254: U2.3 6.314,22.052 6.339,22.077 R7.1
NetR13_1: R13.1 U3.2 | length 6
  Top Layer w0.254: U3.2 52.329,21.476 52.446,21.358 52.509,21.358 54.076,19.791 v1(54.076,19.58)
  Bottom Layer w0.254: v1(54.076,19.58) 55.735,19.58 56.108,19.207 R13.1
NetR14_1: R14.1 U3.3 | length 9.2
  Top Layer w0.254: U3.3 51.43,22.086 52.571,22.086 53.371,21.286 53.938,20.697 53.988,20.647 54.518,20.647 55.143,20.022 55.143,18.443 54.582,17.881 v1(54.582,17.606)
  Bottom Layer w0.254: v1(54.582,17.606) 54.856,17.606 55.275,17.187 55.669,17.187 56.042,16.814 R14.1
NetR15_1: R15.1 U3.5 | length 5.6
  Top Layer w0.254: U3.5 51.43,23.356 52.577,23.356 54.033,21.901
  Bottom Layer w0.254: 54.033,21.901 55.767,21.901 56.14,21.528 R15.1
NetR16_1: R16.1 U3.8 | length 5.3
  Top Layer w0.254: U3.8 52.939,25.286 v1(54.305,23.92)
  Bottom Layer w0.254: v1(54.305,23.92) R16.1
NetR17_1: R17.1 U3.9 | length 4.9
  Top Layer w0.254: U3.9 53.441,25.921 53.744,26.224
  Bottom Layer w0.254: 53.744,26.224 56.107,26.224 R17.1
NetR18_1: R18.1 U3.11 | length 5.3
  Top Layer w0.254: U3.11 52.768,27.191 v1(54.045,28.468)
  Bottom Layer w0.254: v1(54.045,28.468) 56.133,28.468 R18.1
NetR19_1: R19.1 U3.12 | length 6.6
  Top Layer w0.254: U3.12 52.329,27.826 52.446,27.943 52.509,27.943 52.979,28.413 52.979,29.429 v1(53.844,30.294)
  Bottom Layer w0.254: v1(53.844,30.294) 54.01,30.294 54.645,30.929 R19.1
NetR21_1: R21.1 U3.19 | length 5.3
  Top Layer w0.254: U3.19 53.586,32.271 54.236,32.921 v1(54.372,32.921)
  Bottom Layer w0.254: v1(54.372,32.921) 54.487,32.921 55.148,33.582 56.136,33.582 R21.1
NetR23_1: R23.1 U3.20 | length 6.5
  Top Layer w0.254: U3.20 52.718,32.906 54.788,34.976 54.788,35.866 v1(54.914,35.992)
  Bottom Layer w0.254: v1(54.914,35.992) 56.119,35.992 R23.1
NetR24_1: R24.1 U3.22 | length 16.3
  Top Layer w0.254: v1(50.51,36.576) 50.51,36.301 49.999,35.79 49.999,34.596 50.302,34.293 50.365,34.293 50.482,34.176 U3.22
  Bottom Layer w0.254: v1(50.51,36.576) 50.705,36.77 50.705,37.094 55.505,41.895 56.776,41.895 56.967,41.703 56.967,39.468 56.14,38.641 R24.1
NetR27_1: R27.1 U3.23 | length 8.6
  Top Layer w0.254: U3.23 52.329,34.811 52.446,34.928 52.509,34.928 53.344,35.763 v1(53.344,35.866)
  Bottom Layer w0.254: v1(53.344,35.866) 53.344,37.871 56.14,40.668 R27.1
NetR29_1: R29.1 U5.2 | length 10.6
  Top Layer w0.254: U5.2 51.317,3.693 52.451,3.693 v1(53.69,4.932)
  Bottom Layer w0.254: v1(53.69,4.932) 55.702,6.943 55.702,11.239 R29.1
NetR30_1: R30.1 U5.13 | length 7.4
  Top Layer w0.254: U5.13 52.216,10.654 52.334,10.771 52.396,10.771 54.048,12.422 v1(54.048,14.249)
  Bottom Layer w0.254: v1(54.048,14.249) 56.063,14.249 R30.1
NetR_2: R.2 U5.25 | length 4.9
  Top Layer w0.254: v1(39.675,18.274) 40.31,17.639 U5.25
  Bottom Layer w0.254: R.2 38.451,19.497 v1(39.675,18.274)
PA0: D2.2 H3.8 U4.48 | length 17.2
  Top Layer w0.254: H3.8 20.102,39.695 20.697,39.695 24.794,35.598 24.794,30.48 25.048,30.226 U4.48
PA1: D1.2 H3.6 U4.47 | length 22.7
  Top Layer w0.254: H3.6 23.894,38.443 26.2,38.443 26.79,37.853 26.79,35.396 27.379,34.807 27.379,34.652 ; U4.47 25.548,30.368 25.248,30.668 25.248,31.912 27.379,34.044 27.379,34.652 ; D1.2 28.472,35.745 27.379,34.652
PA2: H3.4 U4.44 | length 22
  Top Layer w0.254: H3.4 24.36,40.517 24.36,39.906 25.368,38.897 30.006,38.897 30.719,38.184 30.992,37.911 30.992,35.673 30.999,35.666 30.999,33.428 30.794,33.223 29.987,33.223 27.048,30.284 U4.44
PA4: U4.36 U5.48 | length 70
  Top Layer w0.254: U4.36 U4.36 31.05,28.97 31.361,29.281 33.635,29.281 35.669,31.315 35.669,33.332 36.006,33.669 36.006,35.54 35.3,36.245 35.3,37.534 v1@33.125,39.709 ; U5.48 43.708,3.034 v1(44.461,3.786)
  Bottom Layer w0.254: v1(33.061,39.773) 33.238,39.95 40.948,39.95 50.284,30.615 50.284,9.609 v1(44.461,3.786)
PA6: U3.44 U4.34 | length 57.4
  Top Layer w0.254: U4.34 32.05,27.952 32.05,26.938 32.361,26.627 32.767,26.627 37.895,31.755 v1(37.926,31.755) ; U3.44 42.575,23.381 42.693,23.263 42.762,23.263 43.512,22.513 43.512,18.034 44.164,17.382 44.164,12.158 45.566,10.756 48.611,10.756 49.236,11.381 49.236,27.968 v1(46.513,30.69)
  Bottom Layer w0.254: v1(37.926,31.755) 45.448,31.755 v1(46.513,30.69)
PA8: U3.26 U4.31 | length 23.5
  Top Layer w0.254: U4.31 34.397,25.605 33.383,25.605 33.072,25.916 33.072,26.29 37.029,30.247 37.926,30.247 38.992,31.313 38.992,32.948 37.737,34.204 37.737,35.839 ccw(c36.896,36.496) 37.803,35.935 38.241,36.583 ccw(c37.431,37.278) 38.329,36.701 38.414,36.814 38.437,36.839 38.443,36.846 cw(c39.551,35.804) 38.483,36.887 38.576,36.979 38.93,37.297 39.929,37.366 40.515,37.366 40.728,37.154 40.782,37.099 42.755,35.963 43.058,35.66 43.058,35.231 42.755,34.928 42.693,34.928 42.575,34.811 U3.26
PA9: U3.25 U4.30 | length 18.8
  Top Layer w0.254: U4.30 34.401,25.105 35.415,25.105 35.738,25.428 35.738,27.549 37.982,29.793 38.114,29.793 39.446,31.125 39.446,33.136 38.191,34.392 38.191,35.681 38.669,36.394 cw(c39.555,35.799) 38.682,36.413 cw(c39.555,35.799) 38.696,36.432 38.765,36.525 cw(c39.551,35.804) 39.48,36.868 40.117,36.912 40.89,36.139 40.89,35.504 40.948,35.446 U3.25
PA10: U3.40 U4.29 | length 16.2
  Top Layer w0.254: U4.29 35.78,24.603 36.192,25.015 36.192,26.869 37.855,28.532 38.229,28.532 v1(38.424,28.726) ; U3.40 43.259,25.921 v1(44.161,26.822)
  Bottom Layer w0.254: v1(38.424,28.726) 39.67,27.48 43.08,27.48 44.077,26.822 v1(44.161,26.822)
PA12: U3.46 U4.10 U4.27 U4.35 | length 39.6
  Top Layer w0.254: v1(30.124,11.913) 30.124,12.079 29.489,12.714 29.489,13.887 29.511,13.909 29.511,13.951 29.557,13.997 29.557,22.076 31.548,24.066 ; U4.35 31.548,24.066 ; U4.27 32.011,23.603 31.548,24.066 ; v1(38.583,15.723) 38.583,20.502 40.191,22.111 U3.46
  Bottom Layer w0.254: v1(30.124,11.913) 30.399,11.913 30.907,12.421 30.998,12.421 31.699,13.122 31.699,14.64 32.781,15.723 v1(38.583,15.723)
PA13: U3.29 U4.22 U5.47 | length 92.1
  Top Layer w0.254: U4.22 35.922,21.103 37.516,19.509 v1(37.516,18.034) ; v1(39.525,5.038) 39.901,3.908 40.141,3.669 U5.47 ; U3.29 41.676,32.881 42.801,32.881 v1(47.549,28.133) 47.656,28.133 48.016,27.774 v1(48.169,11.823)
  Bottom Layer w0.254: v1(37.516,18.034) 33.594,18.034 29.058,13.497 29.058,11.471 30,10.529 34.403,10.529 35.345,9.587 39.337,9.587 43.337,13.586 47.096,13.586 48.038,14.528 48.038,20.949 47.549,21.438 v1(47.549,28.133) ; v1(39.525,5.038) 41.384,5.038 v1(48.169,11.823)
PA14: R31.2 U3.30 U4.21 U5.36 | length 58.1
  Top Layer w0.254: U4.21 35.78,20.603 36.449,19.934 36.449,17.193 37.513,16.129 37.513,13.727 38.125,13.114 v1(38.125,12.903) ; v1(38.87,10.654) U5.36 ; U3.30 42.575,32.271 42.693,32.153 42.762,32.153 46.482,28.434 46.482,22.188 46.985,21.685 46.985,14.984 v1(46.971,14.97)
  Bottom Layer w0.254: 35.06,11.382 39.085,11.382 42.672,14.97 v1(46.971,14.97) ; v1(38.125,12.903) 37.931,13.098 37.931,13.565 36.434,15.062 35.55,15.062 34.925,14.437 34.925,12.514 R31.2 35.06,11.298 35.704,10.654 v1(38.87,10.654)
PA17: U3.27 U4.9 | length 62.9
  Top Layer w0.254: U4.9 29.057,14.097 29.035,14.075 29.035,10.792 v1(31.699,8.128) ; U3.27 44.374,34.176 44.777,33.773 v1(45.052,33.773)
  Bottom Layer w0.254: v1(31.699,8.128) 31.699,7.908 38.154,1.453 39.589,1.453 49.71,11.574 49.83,12.028 49.83,29.524 46.194,33.16 45.876,33.16 45.263,33.773 v1(45.052,33.773)
PA20: R34.2 U4.16 | length 39.5
  Top Layer w0.254: U4.16@32.559,15.867 33.16,15.265 33.208,15.265 34.439,14.034 34.439,9.452 v1(35.865,8.026) ; v1(38.83,2.52) 38.999,2.19 39.07,2.118 39.194,2.078 46.415,1.956 ccw(c46.431,3.023) 46.431,1.956 56.585,1.956 R34.2
  Bottom Layer w0.254: v1(35.865,8.026) 35.698,8.026 35.063,8.661 33.721,8.661 33.096,8.036 33.096,7.153 37.729,2.52 v1(38.83,2.52)
PA21: U3.47 U4.11 | length 21
  Top Layer w0.254: U4.11 30.057,14.262 30.556,13.762 v1(30.556,13.487) ; v1(40.895,19.269) 40.895,19.405 40.245,20.055 40.245,21.055 40.548,21.358 40.611,21.358 40.728,21.476 U3.47
  Bottom Layer w0.254: v1(30.556,13.487) 30.556,13.546 31.245,14.235 31.245,14.828 33.206,16.789 39.699,16.789 40.895,17.986 v1(40.895,19.269)
PA22: U3.37 U4.14 | length 45.1
  Top Layer w0.254: U4.14 31.557,13.995 31.699,13.853 31.699,10.058 v1(34.163,7.595) ; U3.37 43.049,27.826 43.942,28.718 v1(43.942,28.799) ; v1(45.033,21.247) 46.531,19.749 46.531,18.254 45.765,16.646 v1(45.765,12.066)
  Bottom Layer w0.254: v1(34.163,7.595) 34.33,7.595 34.965,6.96 40.659,6.96 v1(45.765,12.066) ; v1(43.942,28.799) 43.942,28.55 45.228,27.264 45.228,21.441 v1(45.033,21.247)
PA23: R31.1 U4.15 U4.19 | length 9.4
  Top Layer w0.254: v1(32.766,14.199) 32.766,14.217 32.057,14.926 32.057,18.642 33.018,19.603 U4.19
  Bottom Layer w0.254: R31.1 32.766,12.548 v1(32.766,14.199)
PA25: U3.41 U4.25 | length 8.4
  Top Layer w0.254: U4.25 36.436,22.603 39.119,25.286 U3.41
PA26: U3.38 U4.26 | length 10.2
  Top Layer w0.254: U4.26 35.78,23.103 37.1,24.423 37.1,26.493 37.798,27.191 U3.38
PA27: R.1 U4.37 | length 52.7
  Top Layer w0.254: U4.37 U4.37 30.55,29.112 31.173,29.735 32.58,29.735 v1(33.604,30.759)
  Bottom Layer w0.254: v1(33.604,30.759) 32.795,29.95 24.469,29.95 24.066,30.353 21.734,30.353 21.585,30.204 21.585,28.995 22.999,27.581 38.806,27.581 40.632,25.756 44.085,25.756 44.774,25.067 44.774,24.183 42.551,21.961 R.1
PA28: R9.2 U4.38 | length 42.9
  Top Layer w0.254: R9.2 9.849,20.026 10.222,20.399 10.61,20.399 11.064,20.853 v1(11.339,20.853) ; U4.38 30.048,29.335 30.697,29.984 30.779,29.984 30.985,30.189 31.255,30.189 34.696,33.631 34.696,33.824 v1(34.939,35.098)
  Bottom Layer w0.254: v1(11.339,20.853) 11.339,23.513 14.869,27.043 15.558,27.043 ; 15.953,27.043 19.466,30.556 19.466,32.049 22.515,35.098 v1(34.939,35.098)
PA31: R20.1 U4.52 | length 46.2
  Top Layer w0.254: v1(17.424,30.023) 20.528,26.919 20.528,25.946 21.767,24.708 22.051,24.708 22.097,24.662 22.24,24.662 U4.52@22.286,24.616 ; v1(24.968,4.902) 25.163,5.097 25.817,5.097 26.545,5.825 R20.1
  Bottom Layer w0.254: 10.431,23.092 9.818,22.479 9.818,20.223 14.599,15.443 18.567,15.443 20.222,14.275 ; 10.641,24 10.864,24 16.692,29.828 17.23,29.828 v1(17.424,30.023) ; 20.222,14.275 ccw(c20.367,14.483) 20.23,14.269 20.303,14.222 cw(c20.166,14.009) 20.345,14.188 20.433,14.1 cw(c20.254,13.921) 20.445,14.088 20.468,14.061 ; 20.469,14.06 24.968,9.042 v1(24.968,4.902)
PLLRC: C19.1 R28.1 U4.63 | length 35.5
  Top Layer w0.254: v1(17.48,14.22) 18.805,14.22 v1(19.658,13.367) 19.658,16.994 21.778,19.114 U4.63
  Bottom Layer w0.254: R28.1 11.852,1.497 12.001,1.348 17.21,1.348 19.658,3.796 v1(19.658,13.367) ; C19.1 14.448,11.189 v1(17.48,14.22)
RESET: H4.10 U4.39 | length 18.2
  Top Layer w0.254: H4.10@28.855,41.418 29.209,41.418 31.92,38.706 32.685,38.706 33.798,37.594 33.873,37.519 33.873,33.449 31.067,30.643 30.796,30.643 30.789,30.636 30.706,30.636 29.548,29.477 U4.39
RTCK: H4.2 U4.53 | length 41.5
  Top Layer w0.254: v1(18.644,36.805) 16.358,34.519 16.358,29.573 20.074,25.857 20.074,25.758 21.579,24.254 21.735,24.254 21.883,24.233 21.9,24.216 22.049,24.209 22.116,24.142 22.53,24.142 22.605,24.139 U4.53 ; v1(39.091,38.429) 39.091,39.898 39.103,39.91 39.103,41.661 H4.2
  Bottom Layer w0.254: v1(18.644,36.805) 20.092,38.252 38.813,38.252 v1@38.941,38.125
TDI: H4.6 U4.33 | length 17.1
  Top Layer w0.254: U4.33 32.548,28.7 32.55,28.702 33.698,28.702 36.29,31.295 36.29,31.703 36.509,31.922 36.509,35.825 36.082,36.252 36.082,36.353 35.852,36.584 35.852,39.855 H4.6
TDO: H4.8 U4.49 | length 40.2
  Top Layer w0.254: v1(22.828,29.261) 22.929,28.095 22.929,26.756 22.733,26.473 22.733,26.116 22.735,26.114 U4.49
  Bottom Layer w0.254: v1(22.828,29.261) 35.4,29.261 36.859,30.72 36.859,32.197 38.914,34.253 40.084,34.253 40.622,34.791 40.622,37.259 40.157,37.724 40.157,38.871 39.533,39.496 37.905,39.496 37.115,38.706 32.619,38.706 31.494,39.831 31.494,41.318 H4.8@31.395,41.418
TMS: H4.4 U4.51 | length 35.5
  Top Layer w0.254: v1(19.126,34.214) 19.126,30.666 21.825,27.967 22.021,27.718 22.021,27.132 21.378,26.489 21.378,25.738 21.955,25.162 22.24,25.162 U4.51@22.286,25.116 ; H4.4 36.819,41.428 36.819,36.871 36.981,36.708 v1@37.175,36.903
  Bottom Layer w0.254: v1(19.126,34.214) 21.621,36.708 36.981,36.708 v1(37.058,36.785)
TST: H3.10 U4.40 | length 29
  Top Layer w0.254: v1(25.81,39.964) 29.581,39.964 31.446,38.099 31.446,36.421 31.496,36.371 31.496,31.714 30.879,31.097 30.608,31.097 30.601,31.09 30.518,31.09 29.048,29.619 U4.40
  Bottom Layer w0.254: H3.10 17.293,39.964 v1(25.81,39.964)
USB_DM: R4.2 U4.56 | length 16.2
  Top Layer w0.254: R4.2 9.84,24.711 11.661,26.532 18.757,26.532 19.62,25.669 19.62,25.138 22.143,22.616 23.157,22.616 U4.56
USB_DP: H3.16 R7.2 R9.1 U4.57 | length 46.6
  Top Layer w0.254: v1(7.77,17.813) 7.77,18.088 7.385,18.474 7.385,18.796 ; R7.2 9.855,21.877 8.377,20.399 7.758,20.399 7.385,20.026 7.385,18.796 ; U4.57@22.286,22.116 21.813,22.116 21.397,22.531 19.976,22.531 18.89,21.445 14.352,21.445 11.703,18.796 7.385,18.796
  Bottom Layer w0.254: 7.4,18.393 7.77,18.022 v1(7.77,17.813) ; v1@7.795,18.393 H3.16
V_EXT: H2.19 Q1.3 R2.2 | length 57.2
  Top Layer w0.254: Q1.3 22.447,2.982 22.986,2.443 v1(24.721,2.443) ; v1(29.358,1.861) 29.369,1.85 31.306,1.85 31.949,2.493 R2.2
  Bottom Layer w0.254: v1(24.721,2.443) 26.164,0.999 34.133,0.999 ; v1(29.358,1.861) 33.272,1.861 34.133,0.999 ; H2.19 62.976,11.359 52.616,0.999 34.133,0.999
VT: H1.2 R32.1 U3.7 U3.18 U5.7 U5.18 | length 122.9
  Top Layer w0.254: U5.7 54.624,6.844 55.423,5.969 ; U5.18 52.216,13.829 52.334,13.946 52.396,13.946 52.981,14.531 52.981,14.691 53.606,15.315 54.489,15.315 55.423,14.382 55.423,5.969 ; U3.7 52.329,24.651 52.446,24.533 52.509,24.533 53.186,23.856 53.186,23.53 53.864,22.853 54.747,22.853 55.372,23.478 55.372,31.394 55.131,31.636 ; U3.18 55.131,31.636 ; H1.2 57.105,45.601 58.834,45.601 66.901,37.535 66.901,6.549 60.985,0.633 58.708,0.633 58.022,1.32 58.022,3.022 56.962,4.082 R32.1@56.962,4.267 ; v1(61.062,36.093) 56.604,31.636 55.131,31.636 ; 55.423,5.969 55.688,5.704 55.74,5.704 56.962,4.482 R32.1 55.953,5.387 55.688,5.678 55.423,5.969
  Bottom Layer w0.254: H1.2 57.105,45.601 58.834,45.601 61.062,43.373 v1(61.062,36.093)
XIN: C21.1 U4.62 Y1.1 | length 27.2
  Top Layer w0.254: Y1.1 14.567,24.568 16.659,24.568 18.405,22.822 C21.1 ; v1(21.209,16.51) 23.658,16.51 24.486,17.338 24.486,19.301 24.175,19.612 23.161,19.612 U4.62
  Bottom Layer w0.254: Y1.1 13.057,23.183 13.057,18.951 15.498,16.51 v1(21.209,16.51)
Xout: C20.1 U4.61 Y1.2 | length 8.3
  Top Layer w0.254: Y1.2 14.545,19.551 15.513,20.518 C20.1 ; 19.406,20.114 U4.61
pads on no net: H2.17 H3.2 U2.0 U3.13 U3.14 U3.16 U3.17 U3.32 U3.33 U3.35 U3.36 U3.43 U4.6 U4.13 U4.23 U4.32 U4.42 U4.43 U5.3 U5.5 U5.6 U5.8 U5.9 U5.11 U5.12 U5.14 U5.16 U5.17 U5.19 U5.20 U5.22 U5.23 U5.26 U5.27 U5.29 U5.30 U5.32 U5.33 U5.35 U5.37 U5.38 U5.40 U5.41 U5.43 U5.44 U5.46

## Silkscreen, mask and mechanical layers (free items; w line width, h text height)
Top Overlay:
  drawing of 15 lines, arcs and shapes, not listed